# Altium PCB DGCtrl.PcbDoc (part 3 of 3)
Units mm, origin at the board's own origin, x right, y up, seen from the top; angles counter-clockwise.
Board outline 197.61 x 87.2 mm, 2 copper layers (Top Layer, Bottom Layer); 304 components, 306 nets, 985 pads, 136 vias.
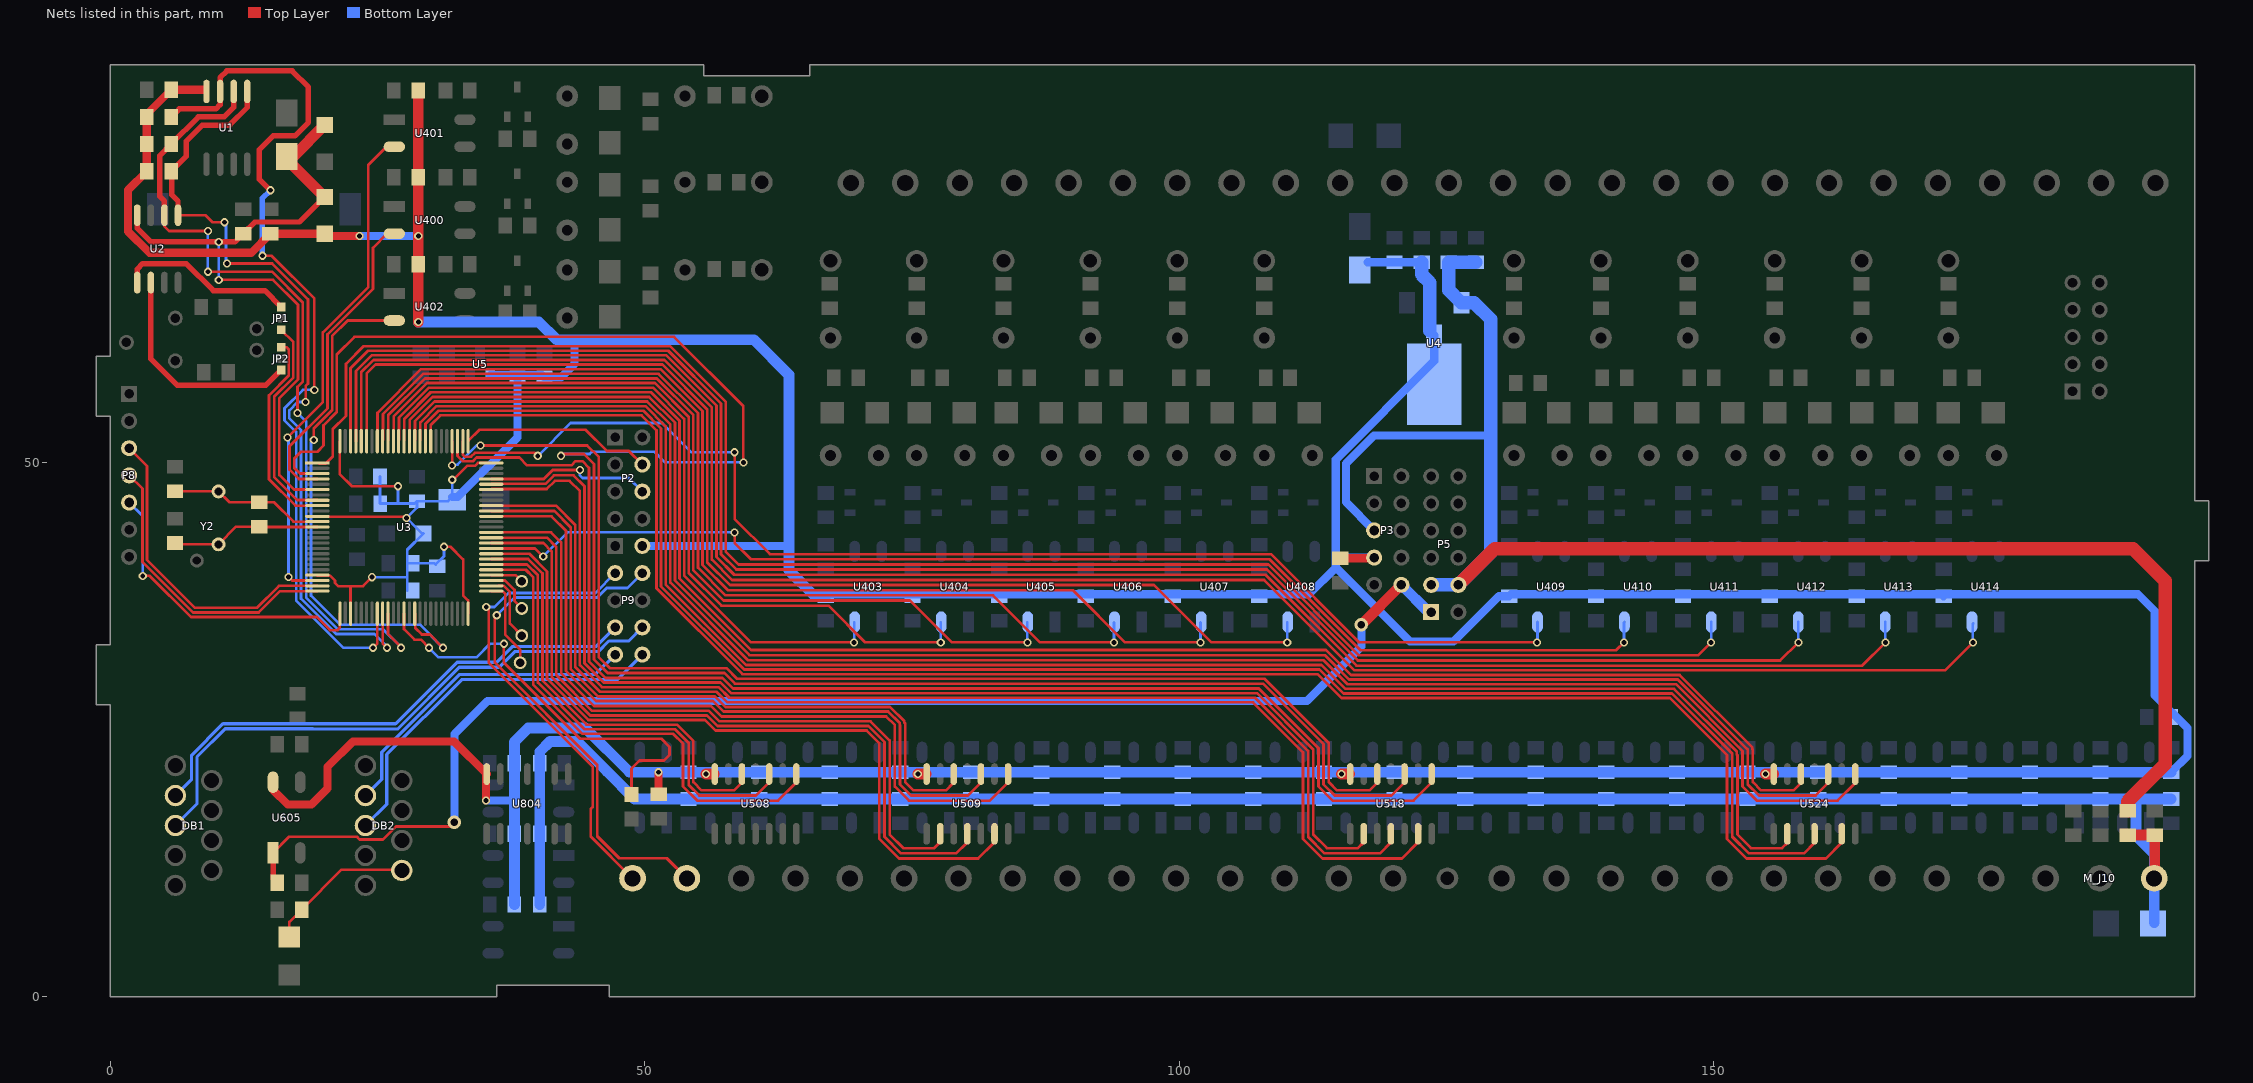
[diagram p3: the nets of this part, all layers, seen from the top]

## Via types
v1: diameter 0.762, hole 0.457, Top Layer to Bottom Layer, tented both sides, 126 vias
v2: diameter 1.27, hole 0.711, Top Layer to Bottom Layer, tented both sides, 10 vias

## Nets (pads, with @x,y where several pads share a name; then routed paths per layer and width w, separated by ;. In a path a pad name is that pad's centre, name@x,y a point inside that pad or via, vN(x,y) a via of type N, cw(c..) or ccw(c..) an arc to the next point about the centre after c; other vN are vias at no path point) (continued)
OSC1: C20.2 R6.2 U3.12 Y2.2 | length 14.5
  Top Layer w0.254: C20.2@6.071,47.269 Y2.2@10.141,47.269 11.157,46.253 R6.2@13.951,46.253 15.342,46.253 17.159,44.436 U3.12@19.387,44.436
OSC2: C21.1 R6.1 U3.13 Y2.1 | length 14.1
  Top Layer w0.254: C21.1@6.071,42.443 6.198,42.316 Y2.1@10.141,42.316 11.792,43.967 R6.1@13.951,43.967 13.982,43.936 U3.13@19.387,43.936
OX1: JP2.1 U2.2 | length 21.4
  Top Layer w0.508: U2.2@3.81,67.31 U2.2@3.81,66.802 3.81,59.665 6.274,57.201 14.58,57.201 JP2.1@16.002,58.623
OX2: JP1.1 U2.1 | length 16.9
  Top Layer w0.508: U2.1@2.54,66.548 U2.1@2.54,66.802 2.54,68.072 3.048,68.58 7.112,68.58 9.652,66.04 14.478,66.04 JP1.1@16.002,64.516
OX3: JP1.3 U3.8 | length 19.9
  Top Layer w0.254: JP1.3@16.002,62.382 17.139,61.246 17.139,57.918 15.342,56.121 15.342,48.603 17.485,46.46 19.363,46.46 U3.8@19.387,46.436
OX4: JP2.3 U3.9 | length 19.3
  Top Layer w0.254: JP2.3@16.002,60.757 16.51,60.757 16.707,60.56 16.707,58.097 14.859,56.249 14.859,48.404 17.326,45.936 U3.9@19.387,45.936
P_IN1: U3.57 U508.12 | length 40.8
  Top Layer w0.254: U3.57@35.651,40.936 39.101,40.936 40.437,39.601 40.437,29.57 44.556,25.451 53.035,25.451 54.559,23.927 54.559,20.066 55.321,19.304 58.369,19.304 U508.12@59.055,19.99
P_IN2: U3.56 U508.10 | length 43.6
  Top Layer w0.254: U3.56@35.651,40.436 38.99,40.436 40.005,39.422 40.005,29.391 44.377,25.019 52.856,25.019 54.127,23.748 54.127,19.815 55.121,18.821 60.426,18.821 U508.10@61.595,19.99
P_IN3: U3.55 U508.8 | length 46.3
  Top Layer w0.254: U3.55@35.651,39.936 38.88,39.936 39.573,39.243 39.573,29.212 44.198,24.587 52.677,24.587 53.594,23.671 53.594,19.666 54.921,18.339 62.484,18.339 U508.8@64.135,19.99
P_IN4: U3.66 U509.12 | length 65.4
  Top Layer w0.254: U3.66@35.651,45.436 41.559,45.436 43.078,43.917 43.078,30.656 45.642,28.092 56.564,28.092 57.554,27.102 72.961,27.102 74.295,25.769 74.295,25.625 74.371,25.549 74.371,20.066 75.133,19.304 78.181,19.304 U509.12@78.867,19.99
P_IN5: U3.65 U509.10 | length 68.1
  Top Layer w0.254: U3.65@35.651,44.936 41.297,44.936 42.647,43.586 42.647,30.477 45.463,27.661 56.385,27.661 57.376,26.67 72.783,26.67 73.863,25.59 73.863,25.446 73.888,25.421 73.888,19.866 74.933,18.821 80.238,18.821 U509.10@81.407,19.99
P_IN6: U3.62 U509.8 | length 69.9
  Top Layer w0.254: U3.62@35.651,43.436 41.247,43.436 42.189,42.494 42.189,30.288 45.274,27.203 56.196,27.203 57.186,26.213 72.593,26.213 73.406,25.4 73.406,19.666 74.733,18.339 82.296,18.339 U509.8@83.947,19.99
P_IN7: U3.61 U509.2 | length 66.3
  Top Layer w0.254: U3.61@35.651,42.936 40.858,42.936 41.732,42.062 41.732,30.106 45.092,26.746 56.006,26.746 56.997,25.756 71.129,25.756 72.923,23.961 72.923,15.164 74.193,13.894 77.089,13.894 U509.2@77.597,14.402
P_IN8: U3.60 U509.4 | length 69
  Top Layer w0.254: U3.60@35.651,42.436 40.52,42.436 41.3,41.656 41.3,29.928 44.914,26.314 55.827,26.314 56.818,25.324 70.95,25.324 72.44,23.833 72.44,14.964 73.993,13.411 79.146,13.411 U509.4@80.137,14.402
P_IN9: U3.58 U509.6 | length 70.6
  Top Layer w0.254: U3.58@35.651,41.436 39.212,41.436 40.869,39.78 40.869,29.749 44.735,25.883 55.648,25.883 56.639,24.892 70.771,24.892 71.958,23.705 71.958,14.764 73.793,12.929 81.203,12.929 U509.6@82.677,14.402
P_IN10: U3.79 U518.12 | length 116.2
  Top Layer w0.254: v1@31.993,49.773 U3.79@31.993,51.967 ; v1(34.646,51.562) 44.627,51.562 45.72,50.469 45.72,31.75 46.736,30.734 57.658,30.734 58.649,29.743 108.001,29.743 113.995,23.75 113.995,20.066 114.757,19.304 117.805,19.304 U518.12@118.491,19.99
  Bottom Layer w0.254: v1@31.993,49.773 32.501,49.773 34.29,51.562 v1(34.646,51.562)
  other v1: 31.993,49.682
P_IN11: U3.3 U518.10 | length 185.2
  Top Layer w0.254: U3.3@19.387,48.936 17.762,48.936 17.221,49.477 17.221,50.344 17.855,50.978 19.379,50.978 19.964,51.563 19.964,53.444 21.198,54.677 21.198,60.061 22.859,61.722 52.745,61.722 59.233,55.234 v1(59.233,49.987) ; v1@42.189,50.775 44.323,50.775 45.263,49.835 45.263,31.561 46.547,30.277 57.469,30.277 58.459,29.286 107.848,29.286 113.512,23.622 113.512,19.866 114.557,18.821 119.862,18.821 U518.10@121.031,19.99
  Bottom Layer w0.254: v1@42.189,50.775 44.856,50.775 45.06,50.978 50.927,50.978 51.918,49.987 v1(59.233,49.987)
  other v1: 42.189,50.597
P_IN12: U3.78 U518.8 | length 119.8
  Top Layer w0.254: U3.78@32.493,51.967 32.493,50.584 32.99,50.087 33.934,50.087 34.291,50.444 38.278,50.444 39.014,49.708 43.155,49.708 43.547,50.1 44.182,50.1 44.806,49.477 44.806,31.371 46.357,29.82 57.279,29.82 58.27,28.829 107.445,28.829 113.03,23.244 113.03,19.666 114.357,18.339 121.92,18.339 U518.8@123.571,19.99
P_IN13: U3.71 U518.2 | length 110.9
  Top Layer w0.254: U3.71@35.693,47.979 40.716,47.979 41.505,48.768 43.358,48.768 44.374,47.752 44.374,31.192 46.178,29.388 57.1,29.388 58.091,28.397 107.266,28.397 112.496,23.167 112.496,23.165 112.547,23.114 112.547,15.164 113.817,13.894 116.713,13.894 U518.2@117.221,14.402
P_IN14: U3.70 U518.4 | length 113.5
  Top Layer w0.254: U3.70@35.7,47.486 40.833,47.486 41.607,48.26 42.977,48.26 43.942,47.295 43.942,31.014 46,28.956 56.922,28.956 57.912,27.965 107.087,27.965 112.064,22.988 112.064,14.964 113.617,13.411 118.77,13.411 U518.4@119.761,14.402
P_IN15: U3.67 U518.6 | length 113.5
  Top Layer w0.254: U3.67@35.651,45.936 41.719,45.936 43.51,44.145 43.51,30.835 45.821,28.524 56.743,28.524 57.733,27.534 106.908,27.534 111.582,22.86 111.582,14.764 113.417,12.929 120.827,12.929 U518.6@122.301,14.402
P_IN16: U3.88 U524.12 | length 160.7
  Top Layer w0.254: U3.88@27.519,52.068 27.519,54.065 29.994,56.54 50.599,56.54 53.264,53.876 53.264,39.13 59.944,32.45 59.944,32.436 113.746,32.436 116.083,30.099 146.817,30.099 153.619,23.297 153.619,23.165 153.67,23.114 153.67,20.066 154.432,19.304 157.48,19.304 158.166,19.99 U524.12@158.166,20.828
P_IN17: U3.87 U524.10 | length 162.8
  Top Layer w0.254: U3.87@28.019,52.068 28.019,53.955 30.173,56.109 50.42,56.109 52.832,53.697 52.832,38.924 59.803,31.953 113.618,31.953 115.904,29.667 146.638,29.667 153.137,23.169 153.137,23.165 153.187,23.114 153.187,19.866 154.232,18.821 159.537,18.821 160.706,19.99 U524.10@160.706,20.828
P_IN18: U3.86 U524.8 | length 164.9
  Top Layer w0.254: U3.86@28.519,52.068 28.519,53.844 30.352,55.677 50.241,55.677 52.4,53.518 52.4,38.745 59.675,31.471 113.49,31.471 115.726,29.235 146.46,29.235 152.705,22.99 152.705,19.666 154.032,18.339 161.595,18.339 163.246,19.99 U524.8@163.246,20.828
P_IN19: U3.85 U524.2 | length 161.5
  Top Layer w0.254: U3.85@29.019,52.068 29.019,53.733 30.53,55.245 50.062,55.245 51.968,53.339 51.968,38.566 59.496,31.039 113.312,31.039 115.547,28.804 146.281,28.804 152.171,22.913 152.171,22.657 152.222,22.606 152.222,15.164 153.492,13.894 156.388,13.894 156.896,14.402 U524.2@156.896,15.24
P_IN20: U3.84 U524.4 | length 163.7
  Top Layer w0.254: U3.84@29.493,51.967 29.493,53.597 30.709,54.813 49.883,54.813 51.537,53.16 51.537,38.387 59.317,30.607 113.133,30.607 115.368,28.372 146.102,28.372 151.74,22.734 151.74,14.964 153.292,13.411 158.445,13.411 159.436,14.402 U524.4@159.436,15.24
P_IN21: U3.83 U524.6 | length 165.7
  Top Layer w0.254: U3.83@29.993,51.967 29.993,53.487 30.888,54.381 49.705,54.381 51.105,52.981 51.105,38.208 59.138,30.175 112.954,30.175 115.189,27.94 145.923,27.94 151.257,22.606 151.257,14.764 153.092,12.929 160.503,12.929 161.976,14.402 U524.6@161.976,15.24
P_OUT1: U3.4 U400.2 | length 29.5
  Top Layer w0.254: U3.4@19.387,48.436 17.651,48.436 16.789,49.298 16.789,51.49 20.334,55.035 20.334,61.964 24.587,66.217 24.587,70.053 25.911,71.377 U400.2@26.588,71.377
P_OUT2: U3.23 U401.2 | length 47.7
  Top Layer w0.254: v1(16.586,52.299) 19.903,55.615 19.903,62.143 24.155,66.396 24.155,77.826 25.835,79.505 U401.2@26.588,79.505 ; v1(16.688,39.268) 17.02,38.936 U3.23@19.387,38.936
  Bottom Layer w0.254: v1(16.586,52.299) 16.688,52.197 v1(16.688,39.268)
P_OUT3: U3.40 U402.2 | length 51
  Top Layer w0.254: v1(19.05,52.07) 19.05,53.14 20.766,54.856 20.766,61.785 22.23,63.249 U402.2@26.588,63.249 ; U3.40@28.493,35.83 28.543,35.781 28.543,34.5 29.159,33.884 29.91,33.884 v1(31.155,32.639) ; v1@31.271,32.755 v1@31.387,32.639
  Bottom Layer w0.254: v1(19.05,52.07) 18.796,51.816 18.796,37.511 21.509,34.798 28.996,34.798 v1(31.155,32.639) ; v1@31.271,32.755 v1@31.387,32.639
P_OUT4: U3.89 U403.2 | length 66
  Top Layer w0.254: U3.89@27.019,52.068 27.019,54.176 29.815,56.972 50.778,56.972 53.696,54.054 53.696,39.381 59.93,33.147 v1(69.596,33.147)
  Bottom Layer w0.254: v1@69.596,33.274 U403.2@69.596,35.003
P_OUT5: U3.90 U404.2 | length 75
  Top Layer w0.254: U3.90@26.519,52.068 26.519,54.287 29.636,57.404 50.957,57.404 54.127,54.233 54.127,39.632 57.183,36.576 67.205,36.576 70.634,33.147 v1(77.699,33.147)
  Bottom Layer w0.254: v1@77.699,33.274 U404.2@77.699,35.003
P_OUT6: U3.91 U405.2 | length 84
  Top Layer w0.254: U3.91@26.019,52.068 26.019,54.397 29.457,57.836 51.135,57.836 54.559,54.412 54.559,39.882 57.383,37.059 74.825,37.059 78.737,33.147 v1(85.801,33.147)
  Bottom Layer w0.254: v1@85.801,33.274 U405.2@85.801,35.003
P_OUT7: U3.92 U406.2 | length 93
  Top Layer w0.254: U3.92@25.519,52.068 25.519,54.508 29.278,58.268 51.314,58.268 54.991,54.591 54.991,40.133 57.583,37.541 82.601,37.541 86.995,33.147 v1(93.904,33.147)
  Bottom Layer w0.254: v1@93.904,33.274 U406.2@93.904,35.003
P_OUT8: U3.93 U407.2 | length 102
  Top Layer w0.254: U3.93@25.019,52.068 25.019,54.619 29.1,58.699 51.493,58.699 55.423,54.77 55.423,40.384 57.783,38.024 90.065,38.024 94.942,33.147 v1(102.006,33.147)
  Bottom Layer w0.254: v1@102.006,33.274 U407.2@102.006,35.003
P_OUT9: U3.95 U408.2 | length 113.6
  Top Layer w0.254: U3.95@24.019,52.068 24.019,58.332 24.818,59.131 51.672,59.131 55.855,54.949 55.855,40.634 57.983,38.506 97.653,38.506 103.012,33.147 v1(110.109,33.147)
  Bottom Layer w0.254: v1@110.109,33.274 U408.2@110.109,35.003
P_OUT10: U3.77 U409.2 | length 117.2
  Top Layer w0.254: U3.77@32.993,51.967 32.993,50.694 33.169,50.519 33.755,50.519 34.112,50.876 39.726,50.876 v1(40.005,50.597) ; v1(58.42,50.927) 58.42,44.704 61.722,41.402 108.59,41.402 116.845,33.147 v1@133.35,33.147
  Bottom Layer w0.254: v1(40.005,50.597) 43.078,53.67 51.638,53.67 54.381,50.927 v1(58.42,50.927) ; v1@133.526,33.196 U409.2@133.526,35.052
  other v1: 133.477,33.147
P_OUT11: U3.59 U410.2 | length 114.5
  Top Layer w0.254: U3.59@35.651,41.936 39.75,41.936 v1(40.513,41.173) ; v1(58.42,43.434) 58.42,42.443 59.944,40.919 108.462,40.919 116.971,32.41 140.868,32.41 v1(141.605,33.147)
  Bottom Layer w0.254: v1@40.577,41.109 v1(40.513,41.173) 42.774,43.434 v1(58.42,43.434) ; v1@141.605,33.274 141.605,35.003 U410.2@141.654,35.052
P_OUT12: U3.1 U411.2 | length 161.7
  Top Layer w0.254: U3.1@19.563,49.887 20.169,49.887 20.828,50.546 20.828,53.086 22.062,54.32 22.062,59.196 23.724,60.858 52.387,60.858 57.582,55.664 57.582,41.637 58.796,40.423 108.348,40.423 116.843,31.928 148.546,31.928 v1(149.765,33.147)
  Bottom Layer w0.254: v1@149.782,33.165 U411.2@149.782,35.052
P_OUT13: U3.98 U412.2 | length 165.8
  Top Layer w0.254: U3.98@22.493,51.967 22.493,58.79 24.13,60.427 52.209,60.427 57.15,55.485 57.15,41.387 58.582,39.954 108.206,39.954 116.715,31.445 156.223,31.445 v1(157.924,33.147)
  Bottom Layer w0.254: v1@157.91,33.161 U412.2@157.91,35.052
P_OUT14: U3.97 U413.2 | length 173.4
  Top Layer w0.254: U3.97@22.993,51.967 22.993,58.528 24.46,59.995 52.03,59.995 56.718,55.306 56.718,41.136 58.382,39.472 108.078,39.472 116.587,30.963 163.9,30.963 v1(166.084,33.147)
  Bottom Layer w0.254: v1@166.038,33.193 U413.2@166.038,35.052
P_OUT15: U3.96 U414.2 | length 180.9
  Top Layer w0.254: U3.96@23.493,51.967 23.493,58.417 24.639,59.563 51.851,59.563 56.286,55.128 56.286,40.885 58.183,38.989 107.95,38.989 116.408,30.531 171.628,30.531 v1(174.244,33.147)
  Bottom Layer w0.254: v1(174.244,33.147) 174.244,34.876 U414.2@174.293,34.925
RS232_RX_A: DB1.3 P9.8 | length 53.9
  Bottom Layer w0.305: DB1.3@6.103,16.014 8.128,18.039 8.128,22.432 10.756,25.06 18.97,25.06 18.986,25.044 26.898,25.044 32.664,30.81 36.385,30.81 37.858,32.283 45.666,32.283 46.656,33.274 48.514,33.274 P9.8@49.784,34.544
RS232_RX_B: DB2.3 P9.10 | length 35.2
  Bottom Layer w0.305: DB2.3@23.883,16.014 25.883,18.014 25.883,22.664 32.886,29.667 47.447,29.667 P9.10@49.784,32.004
RS232_TX_A: DB1.2 P9.7 | length 49
  Bottom Layer w0.305: DB1.2@6.103,18.814 7.62,20.331 7.62,22.606 10.556,25.542 19.17,25.542 19.185,25.527 26.698,25.527 32.464,31.293 36.185,31.293 37.658,32.766 45.466,32.766 P9.7@47.244,34.544
RS232_TX_B: DB2.2 P9.9 | length 30.3
  Bottom Layer w0.305: DB2.2@23.883,18.814 25.4,20.331 25.4,22.864 32.686,30.15 45.39,30.15 P9.9@47.244,32.004
RS485_A: M_J19.2 P9.4 | length 50
  Top Layer w0.254: v1(36.17,35.687) 35.992,35.509 35.992,31.27 45.568,21.694 45.568,15.011 47.625,12.954 52.07,12.954 M_J19.2@53.95,11.074
  Bottom Layer w0.254: v1(36.17,35.687) 37.821,37.338 45.569,37.338 46.458,38.227 48.387,38.227 P9.4@49.784,39.624
RS485_B: M_J19.1 P9.3 | length 44.7
  Top Layer w0.254: v1(35.179,36.449) 35.408,36.22 35.408,31.243 45.136,21.515 45.136,17.752 44.958,17.575 44.958,14.986 M_J19.1@48.87,11.074 M_J19.1@48.768,10.972
  Bottom Layer w0.254: v1(35.179,36.449) 35.962,36.449 37.283,37.77 45.39,37.77 P9.3@47.244,39.624
RS485_CE: P8.3 U3.24 | length 29.8
  Top Layer w0.254: P8.3@1.778,51.308 3.454,49.632 3.454,40.844 7.926,36.373 13.718,36.373 15.782,38.436 U3.24@19.387,38.436
RS485_RXD: P8.5 U3.26 | length 29.6
  Top Layer w0.254: v1(3.048,39.37) 3.707,39.37 7.568,35.509 19.355,35.509 20.574,34.29 21.26,34.29 21.493,34.524 U3.26@21.493,35.83
  Bottom Layer w0.254: P8.5@1.778,46.228 3.064,44.942 3.064,39.386 v1(3.048,39.37) v1@3.048,39.116
RS485_TXD: P8.4 U3.25 | length 27.8
  Top Layer w0.254: P8.4@1.778,48.768 3.023,47.523 3.023,40.665 7.747,35.941 13.897,35.941 15.892,37.936 U3.25@19.387,37.936
SCL: R1.1 U1.6 U2.6 U3.35 | length 77.4
  Top Layer w0.254: U2.6@5.08,73.102 5.08,72.06 5.512,71.628 v1(9.144,71.628) ; v1(9.144,67.818) 15.125,67.818 18.028,64.915 18.028,57.55 17.526,57.048 v1(17.526,54.61) ; U3.35@25.993,35.83 25.993,33.925 27.214,32.704 v1(27.214,32.639)
  Top Layer w0.508: U2.6@5.08,73.61 5.08,74.422 4.648,74.854 4.648,78.689 R1.1@5.715,79.756 8.255,82.296 10.668,82.296 11.557,83.185 U1.6@11.557,84.68
  Bottom Layer w0.254: v1(9.144,67.818) v1(9.144,71.628) ; v1(17.526,54.61) 18.339,53.797 18.339,37.358 21.33,34.366 25.548,34.366 27.214,32.7 v1(27.214,32.639)
SDA: R3.1 U1.5 U2.5 U3.34 | length 76.3
  Top Layer w0.254: U2.5@6.35,73.102 8.94,73.102 9.601,72.441 v1(10.693,72.441) v1@10.719,72.441 ; v1(10.922,68.58) 15.16,68.58 18.51,65.23 18.51,57.35 18.288,57.128 v1(18.288,55.626) ; U3.34@25.493,35.83 25.493,33.046 v1(25.901,32.639)
  Top Layer w0.508: U2.5@6.35,73.61 6.35,74.422 5.766,75.006 5.766,77.158 R3.1@5.715,77.209 7.112,78.606 7.112,80.01 8.636,81.534 11.176,81.534 12.827,83.185 U1.5@12.827,84.68
  Bottom Layer w0.254: v1(10.693,72.441) 10.846,72.288 10.846,68.656 v1(10.922,68.58) ; v1(18.288,55.626) 17.536,55.626 16.764,54.854 16.764,54.102 17.856,53.01 17.856,37.23 21.151,33.934 24.741,33.934 25.901,32.774 v1(25.901,32.639)
SPI2_MISO: SPI2_MISO.1 U3.53 | length 4.6
  Top Layer w0.254: U3.53@35.651,38.936 36.94,38.936 37.821,38.056 37.821,37.008 SPI2_MISO.1@38.506,36.322
SPI2_MOSI: SPI2_MOSI.1 U3.54 | length 3.1
  Top Layer w0.254: U3.54@35.651,39.436 37.932,39.436 SPI2_MOSI.1@38.506,38.862
SPI2_NSS: SPI2_NSS.1 U3.51 | length 8.4
  Top Layer w0.254: U3.51@35.651,37.936 36.719,37.936 36.957,37.698 36.957,33.863 38.354,32.466 SPI2_NSS.1@38.354,31.242
SPI2_SCK: SPI2_SCK.1 U3.52 | length 5.9
  Top Layer w0.254: U3.52@36.322,38.436 36.83,38.436 37.389,37.877 37.389,34.9 SPI2_SCK.1@38.506,33.782
SWD_CLK: P2.4 U3.76 | length 18.1
  Top Layer w0.254: U3.76@33.493,51.967 34.562,53.035 44.482,53.035 46.463,51.054 48.514,51.054 P2.4@49.784,49.784
SWD_DIO: P2.6 U3.72 | length 15.6
  Top Layer w0.254: U3.72@35.651,48.436 40.562,48.436 41.402,49.276 v1(43.942,49.276)
  Bottom Layer w0.254: v1(43.942,49.276) 43.942,48.768 44.196,48.514 48.514,48.514 P2.6@49.784,47.244
TEST: LED1.2 U3.38 | length 40.4
  Top Layer w0.254: U3.38@27.493,35.83 27.493,34.381 28.473,33.401 29.079,33.401 v1(29.841,32.639) ; v1(36.83,33.02) 36.83,31.242 43.942,24.13 51.562,24.13 52.324,23.368 52.324,22.606 51.816,22.098 49.53,22.098 48.768,21.336 LED1.2@48.768,18.923
  Bottom Layer w0.254: v1(29.841,32.639) 30.73,31.75 34.29,31.75 35.56,33.02 v1(36.83,33.02) ; v1@29.972,32.664 v1@30.094,32.543
VBAT: C1.1 D1.2 D2.2 ED1.1 U2.8 U3.6 | length 63.8
  Top Layer w0.254: v1(10.16,67.056) 15.24,67.056 17.57,64.726 17.57,57.739 15.824,55.993 15.824,48.803 17.191,47.436 U3.6@19.387,47.436
  Top Layer w0.508: U2.8@2.54,73.102 2.54,71.882 3.81,70.612 v1(10.16,70.612) 11.684,70.612 C1.1@12.446,71.374 13.539,72.467 17.706,72.467 20.042,74.803 D2.2@20.066,74.803
  Top Layer w1.016: D2.2@20.066,74.803 16.51,78.359 ED1.1@16.51,78.609 17.141,78.609 D1.2@20.066,81.534
  Bottom Layer w0.254: v1(10.16,67.056) v1(10.16,70.612)
VCC_COMM: P3.10 P5.1 R609.1 U605.1 | length 128.7
  Top Layer w0.254: U605.1@15.24,13.462 16.739,14.961 23.091,14.961 23.342,14.709 25.533,14.709 26.742,15.919 31.794,15.919 v2(32.207,16.332)
  Top Layer w0.508: U605.1@15.24,13.462 15.24,11.049 R609.1@15.621,10.668
  Top Layer w1.016: v2(117.05,34.798) P3.10@120.784,38.532
  Bottom Layer w0.762: v2(32.207,16.332) 32.207,24.572 35.296,27.661 111.963,27.661 117.05,32.747 v2(117.05,34.798)
  Bottom Layer w1.016: P3.10@120.784,38.532 P5.1@123.336,35.979
VCCDIDO: D4.2 JP4.2 JP400.2 M_J10.3 R500.2 R501.2 R502.2 R503.2 R504.2 R505.2 R506.2 R507.2 R518.2 R519.2 R520.2 R521.2 R522.2 R523.2 R524.2 R525.2 R536.2 R537.2 R538.2 R539.2 R540.2 R800.1 R801.2 R802.2 R803.1 | length 188.4
  Top Layer w1.016: JP4.2@188.722,15.113 JP400.2@191.262,15.113 191.262,11.125 M_J10.3@191.212,11.074
  Bottom Layer w1.016: R803.1@40.183,8.634 R802.2@40.183,15.24 R800.1@40.183,21.844 40.183,22.911 41.148,23.876 43.688,23.876 46.482,21.082 49.067,18.497 R801.2@54.109,18.497 R500.2@60.713,18.497 R501.2@67.317,18.497 R502.2@73.921,18.497 R503.2@80.525,18.497 R504.2@87.129,18.497 R505.2@93.733,18.497 R506.2@100.337,18.497 R507.2@106.941,18.497 R518.2@113.545,18.497 R519.2@120.149,18.497 R520.2@126.753,18.497 R521.2@133.357,18.497 R522.2@139.961,18.497 R523.2@146.565,18.497 R524.2@153.169,18.497 R525.2@159.773,18.497 R536.2@166.377,18.497 R537.2@172.981,18.497 R538.2@179.585,18.497 R539.2@186.189,18.497 R540.2@192.793,18.497 ; 189.491,18.497 189.491,15.056 191.212,13.335 M_J10.3@191.212,11.074 D4.2@191.212,6.958
VCCMCU_3.3: C2.2 C3.1 C4.1 C6.1 C8.1 C11.1 C12.1 C13.1 C14.2 C15.2 C16.1 C500.1 C800.1 D2.1 D3.2 ED2.1 ED3.1 P3.7 P9.2 R1.2 R3.2 R4.2 R5.2 R7.2 R400.1 R401.1 R402.1 R403.1 R404.1 R405.1 R418.1 R419.1 R420.1 R421.1 R422.1 R423.1 R436.1 R437.1 R438.1 R509.2 R510.2 R511.2 R512.2 R513.2 R514.2 R515.2 R516.2 R527.2 R528.2 R529.2 R530.2 R531.2 R532.2 R533.2 R534.2 R541.2 R542.2 R543.2 R544.2 R545.2 R804.1 R805.1 R806.1 R807.1 U1.8 U3.11 U3.22 U3.28 U3.50 U3.75 U3.100 U4.2 U5.1 U508.14 U509.14 U518.14 U524.14 U605.4 U804.14 | length 636.5
  Top Layer w0.254: U3.22@19.387,39.436 19.387,39.387 20.571,39.387 21.031,38.927 21.031,38.71 21.336,38.405 22.606,38.405 ; U3.11@19.387,44.936 19.436,44.887 27.63,44.887 v1(27.737,44.78) ; U3.100@21.493,51.967 21.493,48.865 22.606,47.752 v1(26.924,47.752) ; U3.28@22.493,35.83 22.493,38.292 22.606,38.405 ; v1(24.486,39.243) 23.647,38.405 22.606,38.405 ; v1(31.242,42.088) 31.826,42.088 33.02,40.894 33.02,37.549 33.493,37.075 U3.50@33.493,35.83 ; v1(32.004,48.362) 32.106,48.362 33.399,49.655 34.113,49.655 34.394,49.936 U3.75@35.651,49.936
  Top Layer w0.762: U1.8@8.861,84.836 C2.2@5.715,84.836 3.429,82.55 R4.2@3.429,82.296 R1.2@3.429,79.756 R3.2@3.429,77.209 1.676,75.457 1.676,71.596 3.677,69.596 13.208,69.596 C12.1@14.986,71.374 D2.1@20.066,71.374 20.269,71.171 v1(23.317,71.171) ; U605.4@15.24,20.062 15.24,19.355 16.612,17.983 18.847,17.983 20.345,19.482 20.345,21.514 22.708,23.876 32.183,23.876 U804.14@35.231,20.828 35.154,20.75 v1(35.154,18.339) ; R5.2@51.308,18.923 v1(51.308,20.996) ; C500.1@115.062,41.021 118.193,41.021 P3.7@118.244,41.072
  Top Layer w1: v1(28.829,63.119) R402.1@28.829,68.519 v1(28.829,71.145) R400.1@28.829,76.647 R401.1@28.829,84.775
  Top Layer w1.016: v1(55.742,20.828) U508.14@56.515,20.828 ; v1(75.554,20.828) U509.14@76.327,20.828 ; v1(115.178,20.828) U518.14@115.951,20.828 ; v1(154.854,20.828) U524.14@155.626,20.828
  Bottom Layer w0.254: v1(24.486,39.243) 27.769,39.243 27.794,39.218 ; C3.1@25.248,48.666 25.248,46.133 C4.1@25.254,46.126 26.924,46.126 ; v1(26.924,47.752) 26.924,46.126 ; C6.1@27.788,37.998 27.794,38.005 27.794,39.218 ; v1(31.242,42.088) 31.242,41.199 30.455,40.411 30.328,40.538 R7.2@28.302,40.538 R7.2@27.794,40.538 ; v1(32.004,48.362) 32.004,46.736 31.623,46.355 C8.1@28.702,46.355 ; 26.924,46.126 28.473,46.126 C8.1@28.702,46.355 ; 27.794,39.218 R7.2@27.794,40.538 ; R7.2@27.794,40.538 27.794,41.808 D3.2@29.318,43.332 29.185,43.332 v1(27.737,44.78) 28.702,45.745 C8.1@28.702,46.355
  Bottom Layer w0.762: v1(23.317,71.171) 28.804,71.171 v1(28.829,71.145) ; ED2.1@32.004,46.736 32.512,46.736 38.1,52.324 C16.1@38.1,57.937 ; v1(35.154,18.339) 37.459,18.339 37.737,18.617 ; U5.1@35.56,58.166 C15.2@40.411,58.166 ; C15.2@40.64,57.937 42.189,57.937 43.434,59.182 43.434,61.468 ; P9.2@49.784,42.164 63.475,42.164 63.5,42.189 ; R403.1@66.935,37.465 67.113,37.643 91.276,37.643 112.141,37.643 114.656,40.157 ; 114.884,41.072 P3.7@118.244,41.072 ; ED3.1@117.622,68.707 C14.2@120.142,68.707 C13.1@122.682,68.707 ; U4.2@123.444,62.288 U4.2@123.857,61.874 123.857,59.468 114.656,50.267 114.656,40.157 ; R545.2@192.793,20.996 194.31,22.513 194.31,25.146 191.262,28.194 191.262,36.068 189.687,37.643 171.511,37.643 R438.1@171.511,37.465 171.333,37.643 155.255,37.643 131.049,37.643 R421.1@130.871,37.465 129.921,37.465 125.679,33.223 121.59,33.223 114.656,40.157
  Bottom Layer w1: v1(28.829,63.119) 40.1,63.119 41.751,61.468 43.434,61.468 60.198,61.468 63.5,58.166 63.5,42.189 63.5,39.878 65.913,37.465 R403.1@66.935,37.465
  Bottom Layer w1.016: R805.1@37.812,8.634 R804.1@37.812,15.24 R806.1@37.812,21.844 37.812,23.842 39.116,25.146 44.45,25.146 48.6,20.996 R807.1@54.109,20.996 R509.2@60.713,20.996 R510.2@67.317,20.996 R511.2@73.921,20.996 R512.2@80.525,20.996 R513.2@87.129,20.996 R514.2@93.733,20.996 R515.2@100.337,20.996 R516.2@106.941,20.996 R527.2@113.545,20.996 R528.2@120.149,20.996 R529.2@126.753,20.996 R530.2@133.357,20.996 R531.2@139.961,20.996 R532.2@146.565,20.996 R533.2@153.169,20.996 R534.2@159.773,20.996 R541.2@166.377,20.996 R542.2@172.981,20.996 R543.2@179.585,20.996 R544.2@186.189,20.996 R545.2@192.793,20.996
  Bottom Layer w1.27: C13.1@122.682,68.707 122.682,67.564 123.444,66.802 U4.2@123.444,62.288
VCCMCU_5V: C5.1 C7.2 JP4.1 P3.5 P5.3 P5.4 U4.3 | length 152.6
  Top Layer w1.27: P5.4@126.118,38.519 129.509,41.91 189.23,41.91 192.227,38.913 192.227,21.756 188.722,18.251 JP4.1@188.722,17.399
  Bottom Layer w0.762: P3.5@118.244,43.808 P3.5@118.244,43.612 115.595,46.26 115.595,49.877 118.22,52.502 128.963,52.502
  Bottom Layer w1.27: P5.3@123.578,38.519 P5.4@126.118,38.519 129.14,41.542 129.14,63.361 127.579,64.922 U4.3@126.397,64.922 125.222,66.098 C5.1@125.222,68.707 C7.2@127.762,68.707
WC: R4.1 U1.7 U3.33 | length 85.7
  Top Layer w0.254: v1(14.254,69.312) 15.111,69.312 19.101,65.322 v1(19.101,56.769) ; v1(24.587,32.639) 24.993,33.045 U3.33@24.993,35.83
  Top Layer w0.508: R4.1@5.715,82.296 6.477,83.058 9.906,83.058 10.287,83.439 U1.7@10.287,84.68 10.287,85.979 10.922,86.614 17.018,86.614 18.542,85.09 18.542,81.788 17.272,80.518 15.24,80.518 13.97,79.248 13.97,76.454 v1(14.986,75.438)
  Bottom Layer w0.254: v1(19.101,56.769) 18.033,56.769 16.307,55.043 16.307,53.913 17.399,52.82 17.399,37.076 21.836,32.639 v1(24.587,32.639)
  Bottom Layer w0.508: v1(14.254,69.312) 14.224,69.342 14.224,74.676 v1(14.986,75.438)
XBOOT0: DB2.9 R608.2 S600.2 | length 14
  Top Layer w0.254: S600.2@16.764,5.588 16.764,6.985 R608.2@17.907,8.128 21.663,11.884 27.213,11.884 DB2.9@27.283,11.814

## Polygon pours and split planes (outlines as drawn)
EX_GND on Top Layer "EX_GND_L01_P000" (hatched 90Degree grid 0.508 track 0.254, remove dead copper, pour order 0): 30.48,86.36 30.48,63.5 30.48,60.96 66.04,60.96 66.04,38.1 177.8,38.1 177.8,48.26 66.04,48.26 66.04,60.96 40.64,60.96 40.64,86.36
GNDDIDO on Top Layer "GNDDIDO_L01_P010" (hatched 90Degree grid 0.508 track 0.254, remove dead copper, pour order 10): 45.72,12.7 45.72,0 195.007,0 195.007,12.7 195.007,15.24 182.88,15.24 182.88,12.7 45.72,12.7
GND_COMM on Top Layer "GND_COMM_L01_P012" (hatched 90Degree grid 0.508 track 0.254, remove dead copper, pour order 12): 0,30.48 0,0 33.02,0 33.02,30.48 0,30.48
GNDMCU on Top Layer "GNDMCU_L01_P022" (hatched 90Degree grid 0.508 track 0.254, remove dead copper, pour order 22): 0,86.36 0,32.9 0.12,33.02 33.02,33.02 35.56,33.02 35.56,0 45.212,0 45.212,15.24 180.34,15.24 180.34,20.32 180.42,20.4 195.007,20.4 195.007,34.987 195.58,35.56 154.94,35.56 63.5,35.56 63.5,58.42 22.86,58.42 22.86,86.36
GNDMCU on Top Layer "GNDMCU_L01_P024" (hatched 90Degree grid 0.508 track 0.254, remove dead copper, pour order 24): 115.57,53.34 115.57,73.66 123.19,73.66 123.19,59.69 127,55.88 127,53.34 115.57,53.34
EX_GND on Bottom Layer "EX_GND_L02_P002" (hatched 90Degree grid 0.508 track 0.254, remove dead copper, pour order 2): 30.408,86.36 30.408,63.5 30.408,60.96 65.968,60.96 65.968,38.1 177.728,38.1 177.728,48.26 65.968,48.26 65.968,60.96 40.568,60.96 40.568,86.36 30.408,86.36
GNDDIDO on Bottom Layer "GNDDIDO_L02_P008" (hatched 90Degree grid 0.508 track 0.254, remove dead copper, pour order 8): 39.37,2.54 39.37,13.97 39.37,24.13 46.99,24.13 46.99,19.05 195.58,19.05 195.58,0 39.37,0 39.37,2.515
GND_COMM on Bottom Layer "GND_COMM_L02_P014" (hatched 90Degree grid 0.508 track 0.254, remove dead copper, pour order 14): 0,30.48 0,0 33.02,0 33.02,30.48 0,30.48
GNDMCU on Bottom Layer "GNDMCU_L02_P020" (hatched 90Degree grid 0.508 track 0.254, remove dead copper, pour order 20): 0,86.36 0,32.9 0.12,33.02 33.02,33.02 35.56,33.02 35.56,0 43.18,0 38.1,0 38.1,15.24 180.34,15.24 180.34,20.32 180.42,20.4 195.007,20.4 195.007,34.987 195.58,35.56 154.94,35.56 63.5,35.56 63.5,58.42 22.86,58.42 22.86,86.36 0,86.36
GNDMCU on Bottom Layer "GNDMCU_L02_P026" (hatched 90Degree grid 0.508 track 0.254, remove dead copper, pour order 26): 115.57,53.34 115.57,73.66 123.19,73.66 123.19,59.69 127,55.88 127,53.34 115.57,53.34

## Keep-outs
Keep-Out Layer:
  the board outline again, w0.2

## Other copper
Top Layer:
  pour cut-out: 40.64,86.36 40.64,59.9 66.04,59.9 66.04,48.26 114.3,48.26 114.3,73.66 129.54,73.66 129.54,48.26 193.04,48.26 193.04,71.12 132.08,71.12 132.08,76.2 111.76,76.2 111.76,71.12 63.5,71.12 63.5,86.36
Bottom Layer:
  rectangle net VCCMCU_3.3: 117.914,53.365 128.328,62.662
  pour cut-out: 40.64,86.36 40.64,60.96 66.04,60.96 66.04,48.26 114.3,48.26 114.3,73.66 129.54,73.66 129.54,48.26 193.04,48.26 193.04,71.12 132.08,71.12 132.08,76.2 111.76,76.2 111.76,71.12 63.5,71.12 63.5,86.36

## Silkscreen, mask and mechanical layers (free items; w line width, h text height)
Top Overlay:
  lines w0.1: 194.892,18.415 194.892,30.615 ; 194.892,56.615 194.892,68.815 ; -1.019,45.94 -0.019,45.94 -0.019,39.192 40.51,39.192 40.51,18.186 194.942,18.186 194.942,30.64 195.942,30.64 195.942,56.64 194.942,56.64 194.942,69.113 62.989,69.113 62.989,71.113 -0.019,71.113 -0.019,65.34 -1.019,65.34 -1.019,45.94
  lines w0.127: 3.462,10.439 8.389,10.439 ; 5.925,7.976 5.925,12.903 ; 21.394,10.414 26.321,10.414 ; 23.857,7.95 23.857,12.878 ; 44.146,8.865 44.146,13.792 ; 46.432,11.074 51.359,11.074 ; 48.895,8.611 48.895,13.538 ; 52.274,8.865 52.274,13.792 ; 56.592,12.09 61.519,12.09 ; 59.055,8.611 59.055,13.538 ; 60.402,8.865 60.402,13.792 ; 68.53,8.865 68.53,13.792 ; 71.832,12.09 76.759,12.09 ; 74.295,8.611 74.295,13.538 ; 76.658,8.865 76.658,13.792 ; 84.786,8.865 84.786,13.792 ; 87.097,12.09 92.025,12.09 ; 89.561,8.611 89.561,13.538 ; 92.914,8.865 92.914,13.792 ; 101.042,8.865 101.042,13.792 ; 102.337,12.09 107.265,12.09 ; 104.801,8.611 104.801,13.538 ; 109.17,8.865 109.17,13.792 ; 120.041,8.611 120.041,13.538 ; 121.139,35.979 126.067,35.979 ; 123.603,33.515 123.603,38.443 ; 133.554,8.865 133.554,13.792 ; 135.306,8.611 135.306,13.538 ; 141.682,8.865 141.682,13.792 ; 149.81,8.865 149.81,13.792 ; 150.572,8.611 150.572,13.538 ; 163.348,12.09 168.275,12.09 ; 165.812,8.611 165.812,13.538 ; 173.609,76.122 178.537,76.122 ; 174.194,8.865 174.194,13.792 ; 176.073,73.658 176.073,78.586 ; 178.613,12.09 183.541,12.09 ; 181.077,8.611 181.077,13.538 ; 181.134,56.629 186.062,56.629 ; 183.598,54.166 183.598,59.093 ; 188.881,76.124 193.809,76.124 ; 190.396,53.67 191.92,53.67 ; 190.574,53.67 192.098,53.67 ; 191.158,52.908 191.158,54.432 ; 191.336,52.908 191.336,54.432 ; 191.345,73.66 191.345,78.588 ; 195.663,43.6 196.222,43.6 ; 195.942,43.231 195.942,43.967 ; 166.066,8.865 166.066,13.792 ; 166.066,8.865 166.066,13.792 ; 166.066,8.865 166.066,13.792 ; 157.938,8.865 157.938,13.792 157.938,8.865
  lines w0.254: -2.508,1.524 -2,0 ; -2.508,85.976 -2,87.5 ; -2.254,0 -1.746,0 ; -2.254,87.5 -1.746,87.5 ; -2,37.742 -2,0 ; -2,49.758 -2,87.5 ; -1.492,1.524 -2,0 ; -1.492,85.976 -2,87.5 ; 0,-2.254 0,-1.746 ; 1.524,-2.508 0,-2 ; 1.524,-1.492 0,-2 ; 91.851,-2 0,-2 ; 103.149,-2 195,-2 ; 193.476,-2.508 195,-2 ; 193.476,-1.492 195,-2 ; 195,-2.254 195,-1.746
  text "1" at 16.764,64.77 h1 r270
  text "2" at 16.764,63.754 h1 r270
  text "3" at 16.764,62.738 h1 r270
  text "3" at 16.764,61.214 h1 r270
  text "2" at 16.707,59.944 h1 r270
  text "1" at 16.764,58.928 h1 r270
  text "G_A" at 121.92,50.038 h1
  text "-V" at 127.286,48.387 h1
  text "+9" at 121.158,46.736 h1
  text "+V" at 127.286,45.72 h1
  text "-9" at 121.158,44.196 h1
  text "+12" at 127.235,43.028 h1
  text "G" at 127.515,40.564 h1
  text "87.5 (mm)" at -0.687,37.996 h1.52 r90
  text "+5" at 127.362,37.821 h1
  text "G_C" at 127.286,35.408 h1
  text "V_C" at 122.174,33.528 h1
  text "JXS-MainV1.0" at 32.512,2.032 h1.2
  text "195 (mm)" at 92.105,-3.313 h1.52
Bottom Overlay:
  rectangle: 174.498,55.118 193.802,77.978
  lines w0.254: 2.547,19.075 3.537,18.085 6.382,18.085 ; 2.572,16.815 3.563,17.805 6.357,17.805 ; 20.733,19.05 21.724,18.059 24.569,18.059 ; 20.759,16.789 21.749,17.78 24.543,17.78
  text "DO15" at 165.183,79.019 h1 r270
  text "DO14" at 160.205,78.867 h1 r270
  text "DO13" at 155.175,78.842 h1 r270
  text "DO12" at 150.146,78.791 h1 r270
  text "DO1" at 68.834,78.74 h1 r270
  text "AC8-" at 170.434,78.74 h1 r270
  text "AC8+" at 175.514,78.74 h1 r270
  text "AC11-" at 180.594,78.74 h1 r270
  text "AGND" at 185.674,78.74 h1 r270
  text "AC11+" at 190.754,78.74 h1 r270
  text "DO2" at 74.029,78.716 h1 r270
  text "DO3" at 79.134,78.716 h1 r270
  text "DO4" at 84.214,78.716 h1 r270
  text "DO5" at 89.313,78.715 h1 r270
  text "DO6" at 94.393,78.715 h1 r270
  text "DO7" at 99.473,78.715 h1 r270
  text "DO8" at 104.553,78.715 h1 r270
  text "DO9" at 109.633,78.715 h1 r270
  text "DO10" at 139.986,78.715 h1 r270
  text "DO11" at 145.219,78.715 h1 r270
  text "DO_COM" at 135.033,78.613 h1 r270
  text "GNDMCU" at 129.801,78.435 h1 r270
  text "+12V" at 124.797,78.359 h1 r270
  text "EX_V+" at 116.84,77.724 h1
  text "EX_GND" at 122.936,77.724 h1
  text "TX_A" at 3.131,18.847 h1 r270
  text "TX_B" at 21.317,18.821 h1 r270
  text "RX_A" at 3.182,13.589 h1 r270
  text "RX_B" at 21.368,13.564 h1 r270
  text "G" at 3.461,10.033 h1 r270
  text "G" at 21.241,9.982 h1 r270
  text "GNDDIDO" at 183.642,6.604 h1 r270
  text "VCCDIDO" at 193.294,6.604 h1 r270
  text "ENCA1" at 63.71,5.182 h1 r270
  text "ENCB2" at 73.87,5.182 h1 r270
  text "DI1" at 78.95,5.182 h1 r270
  text "DI2" at 84.03,5.182 h1 r270
  text "DI3" at 89.135,5.182 h1 r270
  text "DI4" at 94.215,5.182 h1 r270
  text "DI5" at 99.295,5.182 h1 r270
  text "DI6" at 104.375,5.182 h1 r270
  text "DI7" at 109.455,5.182 h1 r270
  text "DI8" at 114.535,5.182 h1 r270
  text "DI9" at 119.615,5.182 h1 r270
  text "DI10" at 124.695,5.182 h1 r270
  text "DI11" at 129.775,5.182 h1 r270
  text "DI12" at 134.881,5.182 h1 r270
  text "DI13" at 139.961,5.182 h1 r270
  text "DI14" at 145.041,5.182 h1 r270
  text "DI15" at 150.146,5.182 h1 r270
  text "DI16" at 155.226,5.182 h1 r270
  text "DI17" at 160.306,5.182 h1 r270
  text "DI" at 160.306,5.182 h1 r270
  text "DI19" at 170.466,5.182 h1 r270
  text "DI20" at 175.546,5.182 h1 r270
  text "DI21" at 180.652,5.182 h1 r270
  text "ENCB1" at 58.528,5.029 h1 r270
  text "ENCA2" at 68.942,5.029 h1 r270
  text "DI18" at 165.716,5.029 h1 r270
  text "RS485_B" at 48.26,3.302 h1 r270
  text "RS485_A" at 53.594,3.048 h1 r270
Top Solder:
  lines w1.016: 50.038,65.278 62.992,65.278 ; 50.038,73.66 61.722,73.66 ; 50.038,81.534 50.292,81.788 61.976,81.788 ; 56.388,65.278 56.388,68.072 ; 56.388,73.66 56.388,76.2 ; 56.642,81.788 56.642,84.328 ; 58.674,84.328 61.214,84.328 ; 58.928,76.2 60.953,76.2 60.96,76.193 ; 59.182,67.818 59.357,67.993 60.96,67.993 ; 61.468,81.788 68.834,81.788 72.39,78.232 ; 61.976,73.914 64.186,76.124 69.298,76.124 ; 63.246,65.532 64.77,67.056 64.77,71.374 66.802,73.406 70.358,73.406 ; 66.294,73.406 76.708,73.406 79.502,76.2 79.756,76.2 ; 67.31,66.802 67.31,68.755 ; 69.85,57.912 69.85,69.088 72.136,71.374 77.978,71.374 80.264,73.66 82.1,73.66 84.563,76.124 ; 71.628,78.994 74.422,76.2 ; 75.438,64.262 77.724,64.262 ; 75.445,67.049 75.445,68.834 ; 77.978,58.42 77.978,68.072 81.534,71.628 85.09,71.628 89.584,76.122 89.662,76.122 ; 83.566,64.516 85.852,64.516 ; 83.573,66.795 83.573,68.834 ; 86.106,58.166 86.106,67.31 94.234,75.438 ; 91.694,67.056 91.701,67.063 91.701,68.834 ; 91.948,64.516 93.472,64.516 ; 93.98,58.42 93.98,70.358 99.744,76.122 99.822,76.122 ; 99.829,67.063 99.829,68.834 ; 100.076,64.516 102.362,64.516 ; 102.108,57.658 102.362,57.912 102.362,73.66 104.824,76.122 104.902,76.122 ; 107.95,64.516 109.982,64.516 ; 107.957,66.555 107.957,68.834 ; 109.982,76.122 110.236,75.868 110.236,58.166 ; 131.325,66.809 131.325,68.834 ; 131.572,64.262 133.858,64.262 ; 133.858,57.658 133.858,69.596 140.384,76.122 140.488,76.122 ; 139.446,64.516 141.986,64.516 ; 139.446,66.548 139.446,68.827 139.453,68.834 ; 141.986,57.912 141.986,71.933 145.568,75.515 145.568,76.122 ; 147.574,64.262 149.606,64.262 ; 147.574,66.802 147.574,68.827 147.581,68.834 ; 149.86,58.42 149.86,75.438 150.544,76.122 150.648,76.122 ; 155.702,64.262 157.988,64.262 ; 155.709,66.809 155.709,68.834 ; 155.728,76.122 155.78,76.122 157.988,73.914 157.988,58.42 ; 160.808,76.122 160.86,76.122 166.116,70.866 166.116,57.912 ; 163.83,64.516 166.116,64.516 ; 163.83,66.802 163.837,66.809 163.837,68.834 ; 165.888,76.122 165.94,76.122 168.91,73.152 171.45,73.152 174.244,70.358 174.244,57.912 ; 171.958,64.262 174.244,64.262 ; 171.958,66.802 171.965,66.809 171.965,68.834
Bottom Solder:
  lines w1.27: 170.968,76.122 173.84,78.994 176.784,78.994 178.562,77.216 178.562,74.93 181.356,72.136 181.356,60.452 182.639,59.169 186.113,59.169 ; 176.048,76.122 176.048,74.396 179.07,71.374 179.07,58.928 181.369,56.629 186.113,56.629 ; 181.16,76.124 181.178,76.124 186.113,71.189 186.113,66.789 183.573,66.789 ; 183.573,61.709 188.963,61.709 191.32,64.066 191.32,76.124 ; 183.573,64.249 187.439,64.249 188.722,65.532 188.722,73.641 186.24,76.124

## Text inside footprints (layer, text, board x,y; h text height)
P2: Top Overlay "8" at 51.308,45.212 h1 r270; Top Overlay "7" at 44.45,44.958 h1 r270; Top Overlay "1" at 46.736,54.356 h1 r270; Top Overlay "2" at 49.276,54.61 h1 r270
P3: Top Overlay "10" at 120.276,37.008 h1 r270; Top Overlay "9" at 117.736,37.008 h1 r270; Top Overlay "1" at 117.736,50.724 h1 r270; Top Overlay "2" at 120.396,50.8 h1 r270
P4: Bottom Overlay "2" at 185.605,54.089 h1 r270; Bottom Overlay "1" at 183.065,54.597 h1 r270; Bottom Overlay "9" at 183.065,68.313 h1 r270; Bottom Overlay "10" at 185.605,68.313 h1 r270
P5: Bottom Overlay "12" at 125.61,50.711 h1 r270; Bottom Overlay "1" at 123.07,51.727 h1 r270; Bottom Overlay "1" at 123.07,50.711 h1 r270; Bottom Overlay "1" at 123.07,33.439 h1 r270; Bottom Overlay "2" at 125.61,33.439 h1 r270
P9: Top Overlay "10" at 49.276,30.48 h1 r270; Top Overlay "9" at 46.736,30.48 h1 r270; Top Overlay "1" at 44.704,42.418 h1 r270; Top Overlay "2" at 51.308,42.672 h1 r270